# Altium PCB PCB2.PcbDoc (part 1 of 2)
Units mil, origin at the board's own origin, x right, y up, seen from the top; angles counter-clockwise.
Board outline 2024.32 x 2031.2 mil, 4 copper layers (Top Layer, Internal Plane 1, Signal Layer 1, Bottom Layer), stack 46.586 mil thick; 94 components, 65 nets, 310 pads, 967 vias.
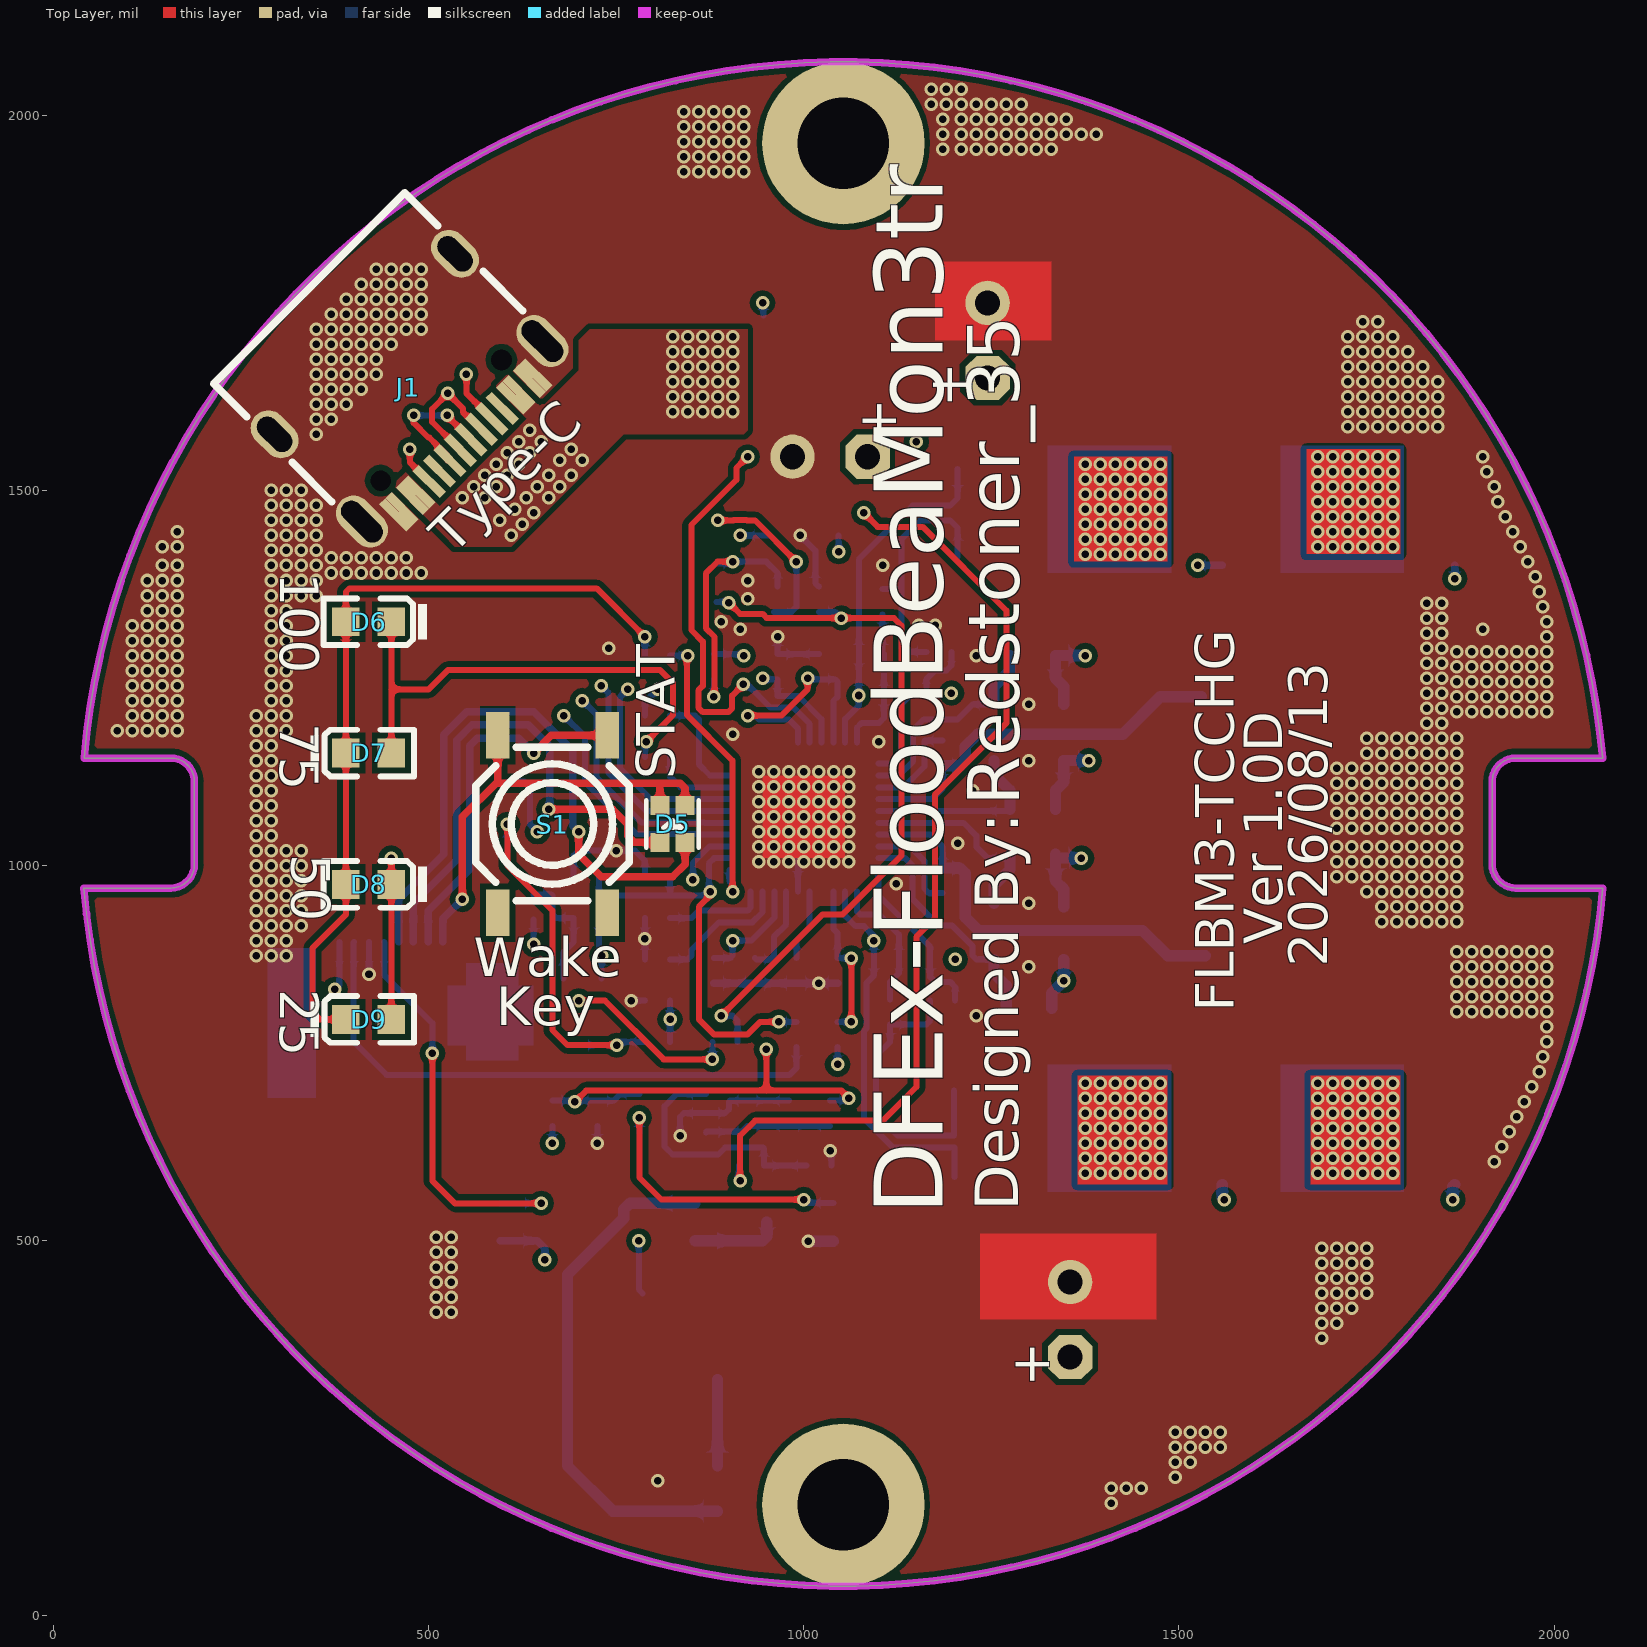
[diagram p0: Top Layer view]
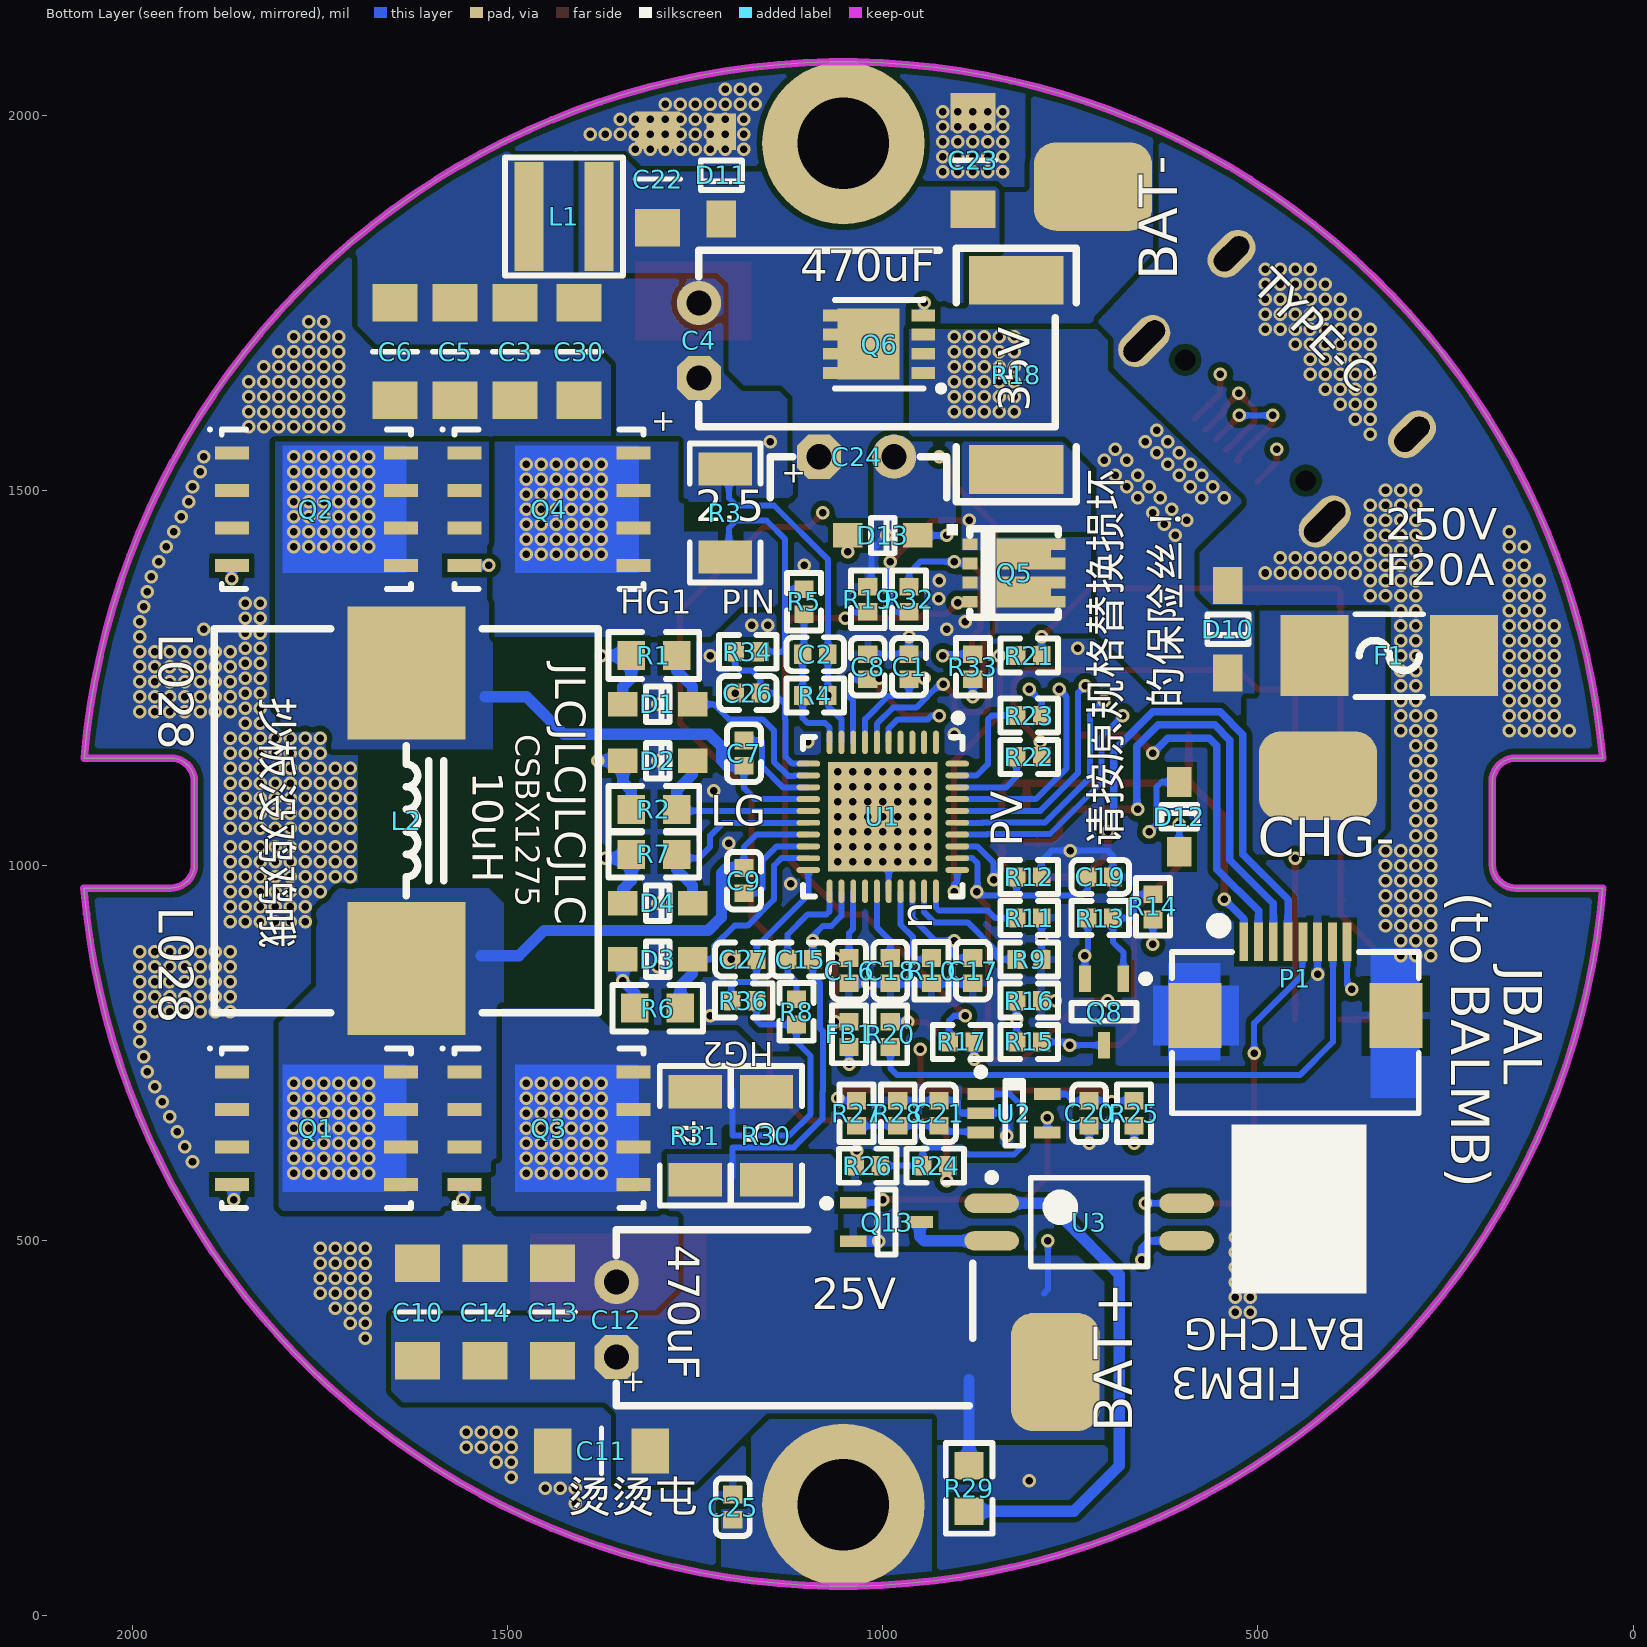
[diagram p1: Bottom Layer view, seen from below]
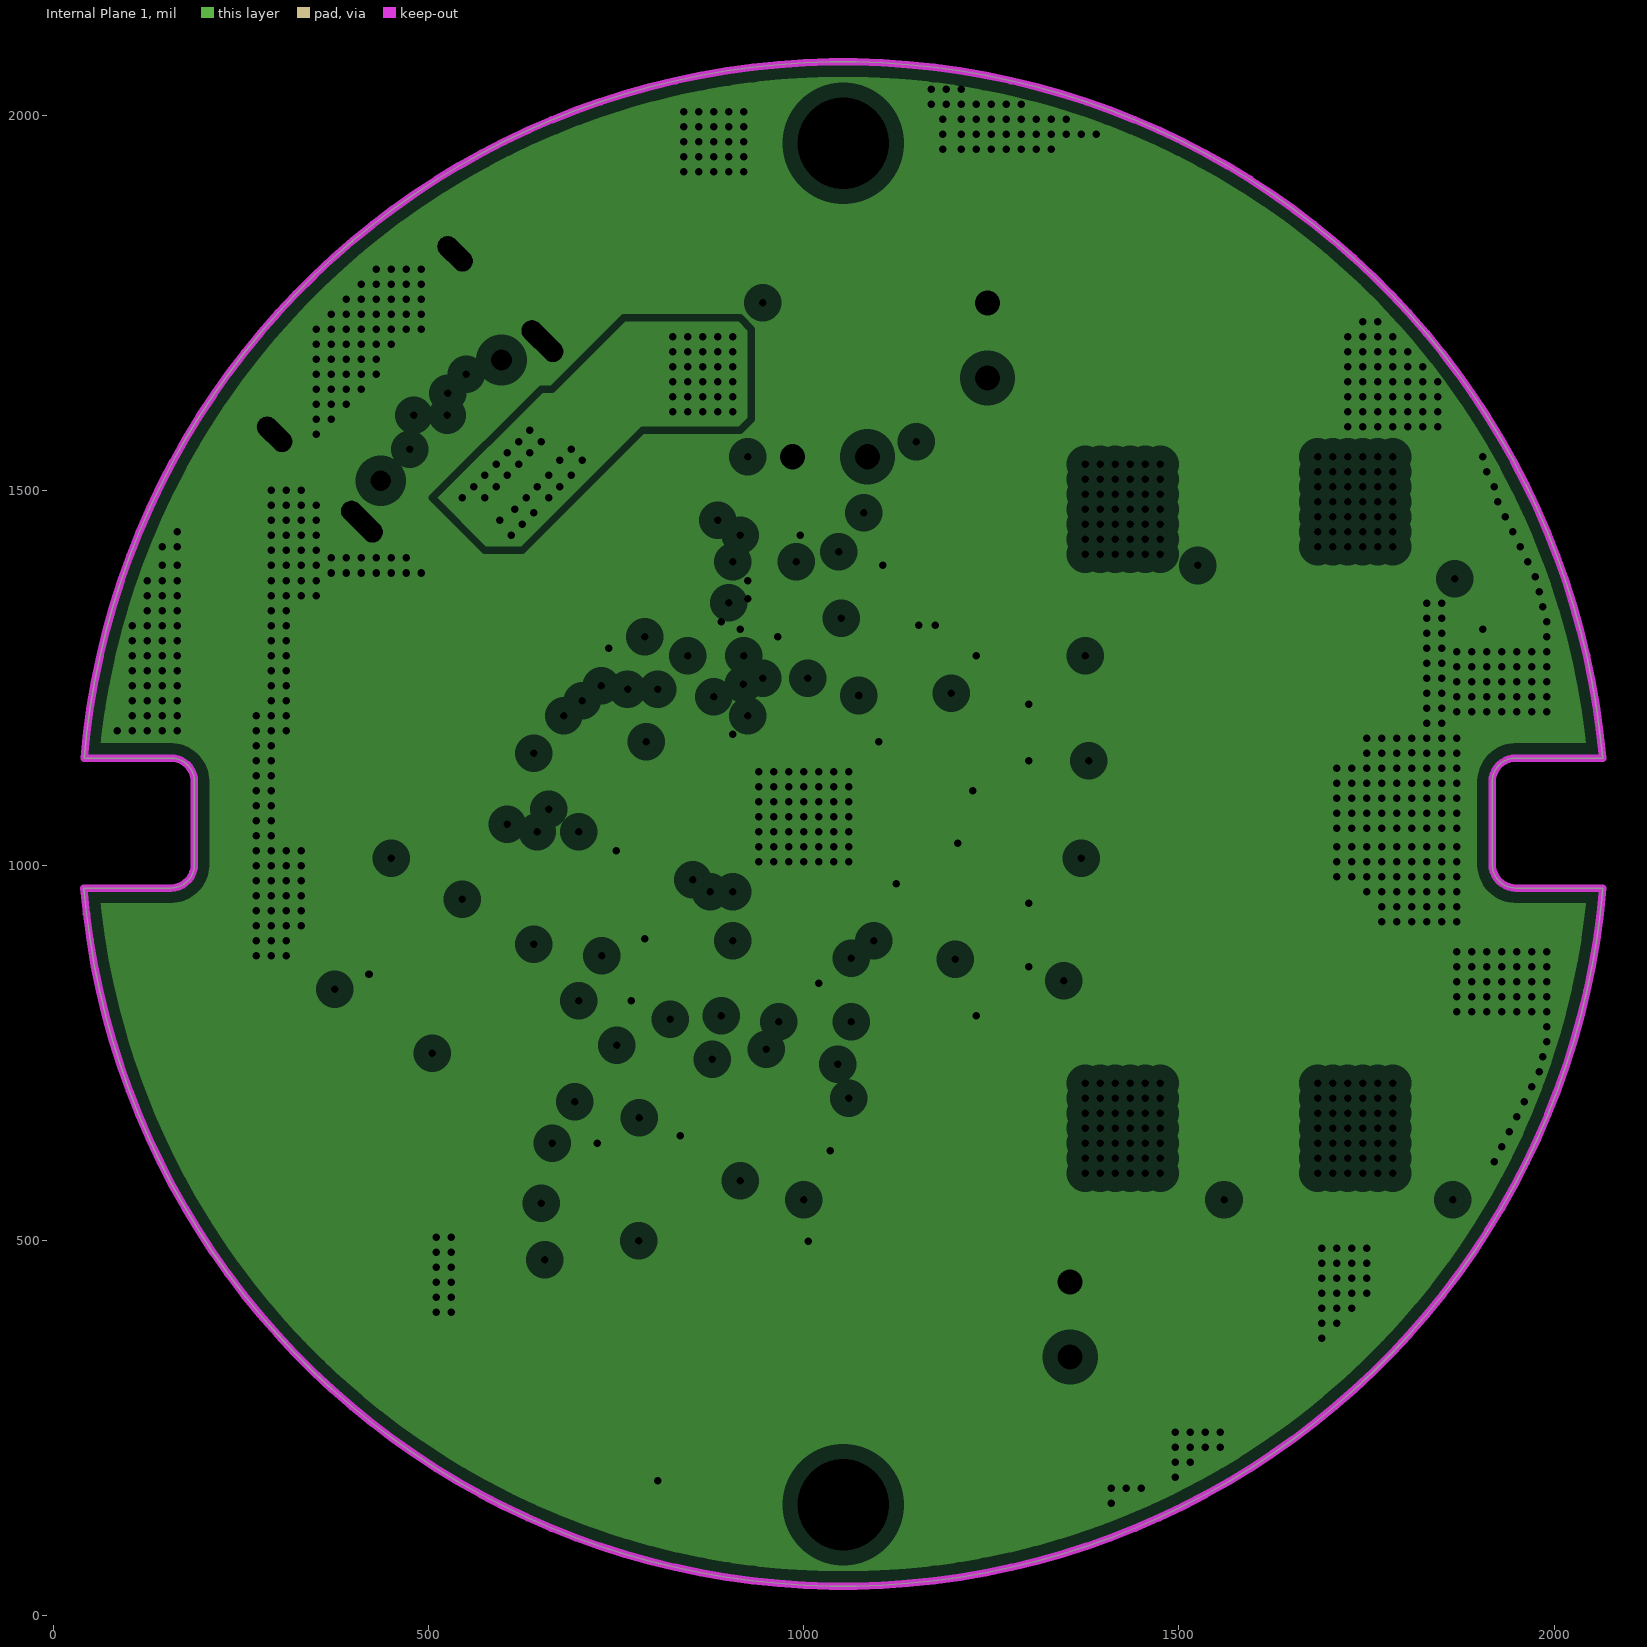
[diagram p2: Internal Plane 1, clearances drawn from the general rule]
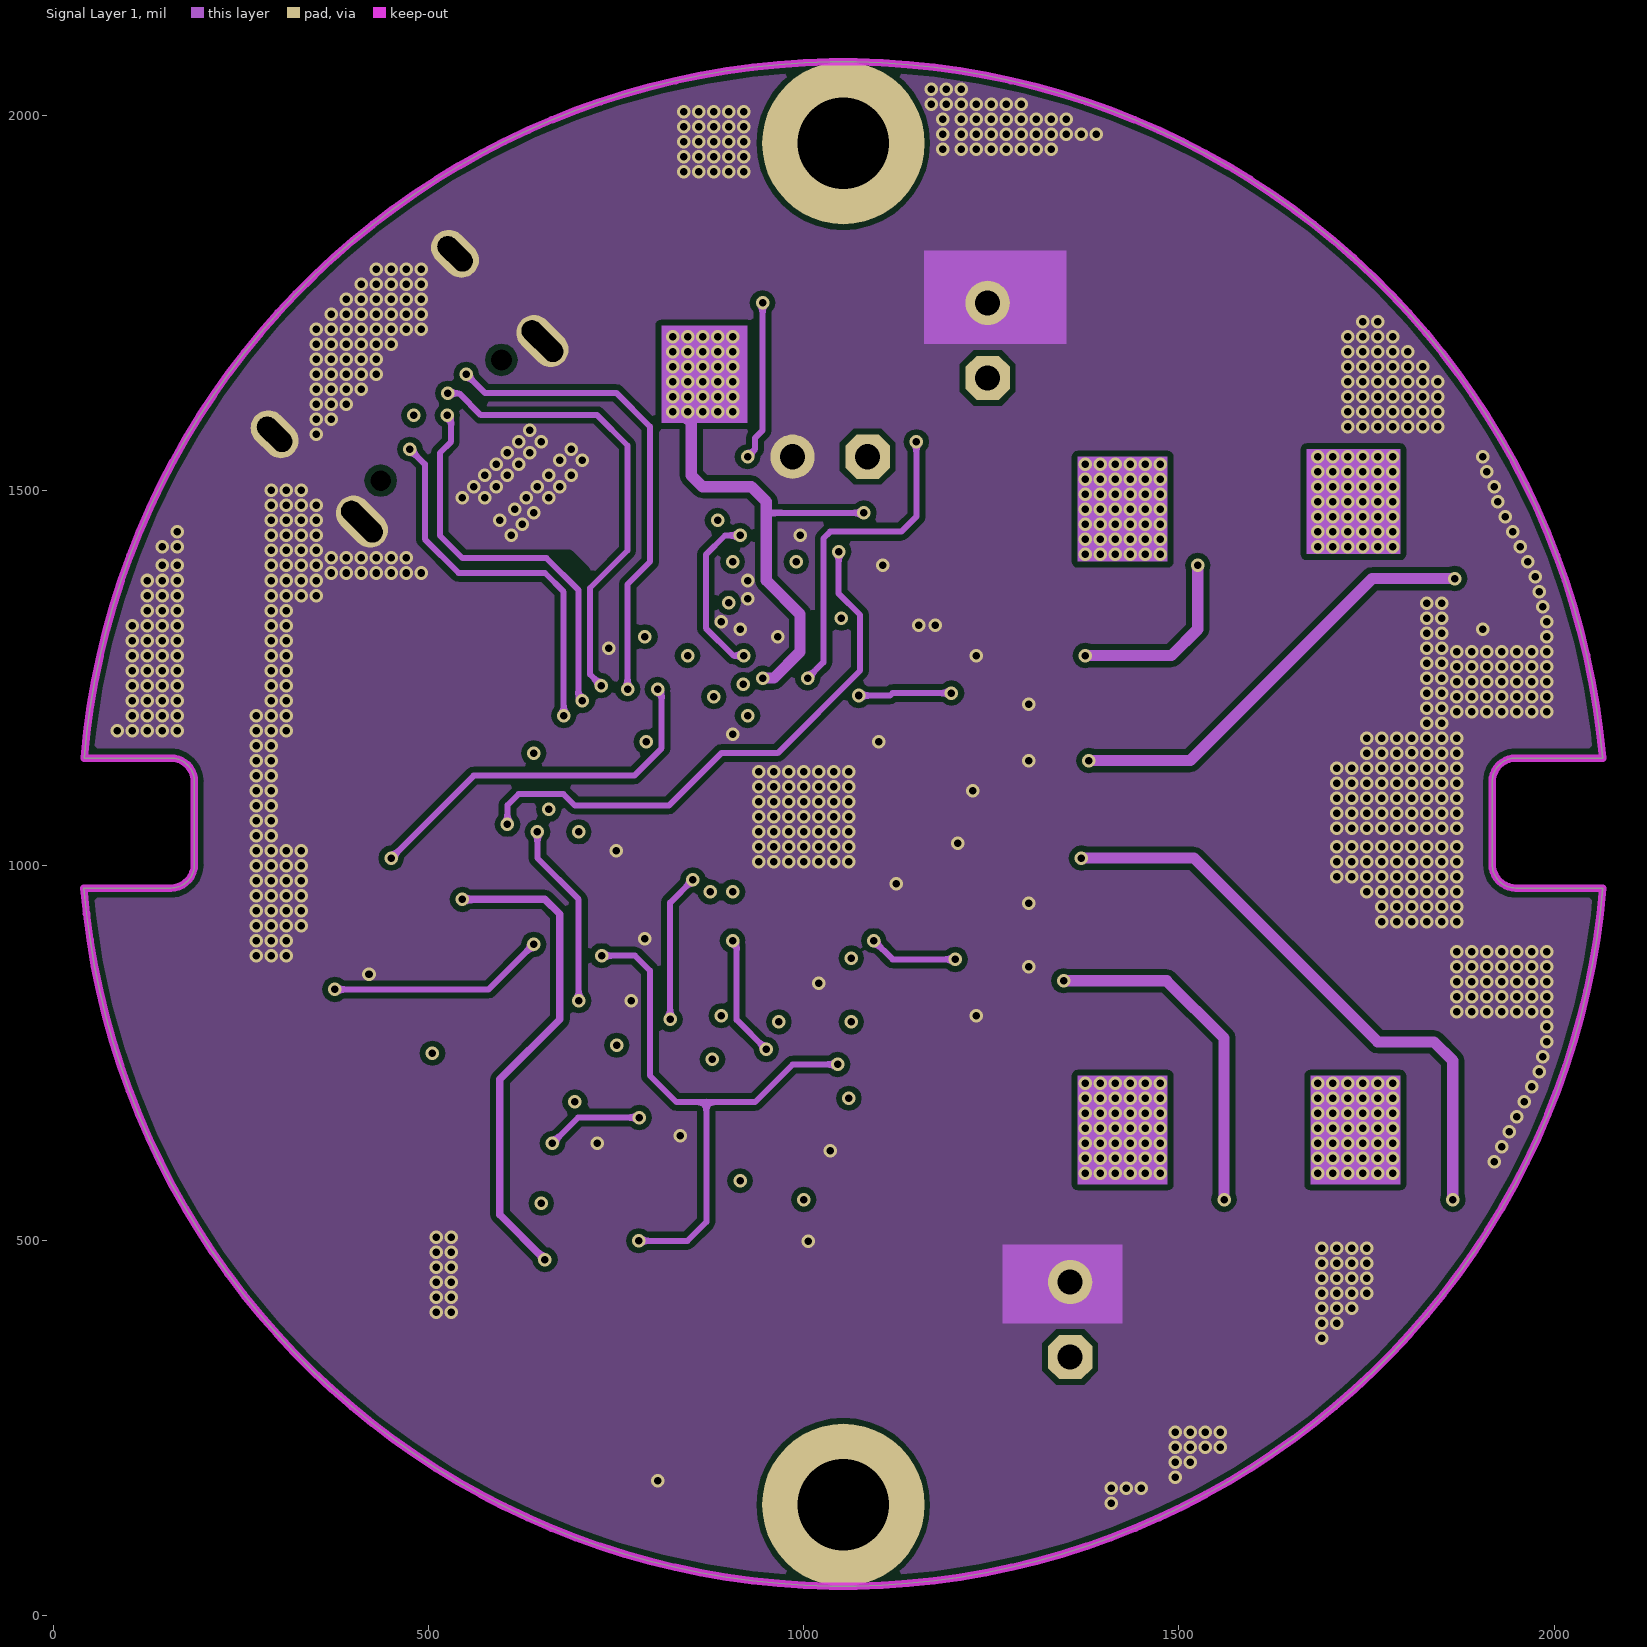
[diagram p3: Signal Layer 1]
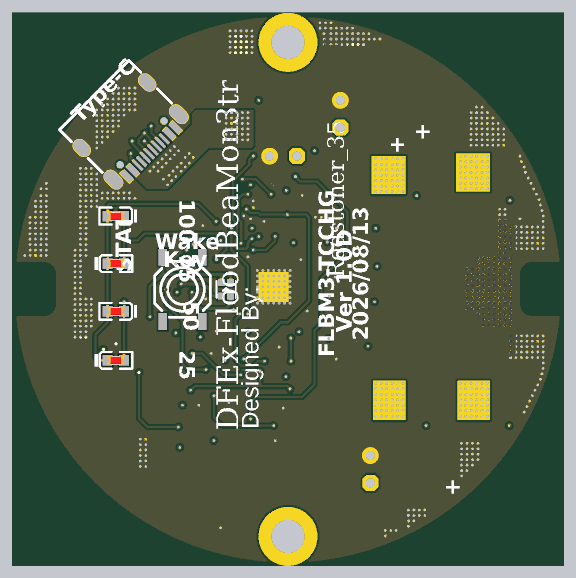
[diagram p5: 3D render of the assembled board from above, using the file's embedded part models]
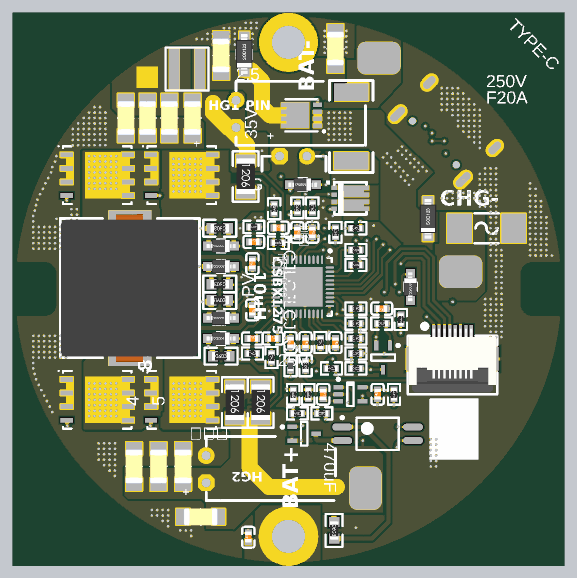
[diagram p6: 3D render of the assembled board from below, using the file's embedded part models]

## Layer stack, top to bottom
Top Solder: solder mask 0.4, Solder Resist, Dk 3.5
Top Layer: signal copper 1.4
Dielectric 1: core 17.976, FR-4, Dk 4.2
Internal Plane 1: plane copper 1.4169
Dielectric 3: prepreg 5, Dk 4.2
Signal Layer 1: signal copper 1.4169
Dielectric 2: core 17.976, Dk 4.2
Bottom Layer: signal copper 1.4
Bottom Solder: solder mask 0.4, Solder Resist, Dk 3.5

## Board outline
40.46,970.17 156.3,970.17 ccw(c156.3,1001.67) 187.8,1001.67 187.8,1111.9 ccw(c156.3,1111.9) 156.3,1143.4 40.68,1143.4 40.68,1143.39 cw(c1052.62,1055.47) 2064.55,1143.39 2064.55,1143.4 1948.94,1143.4 ccw(c1948.94,1111.9) 1917.44,1111.9 1917.44,1001.67 ccw(c1948.94,1001.67) 1948.94,970.17 2064.78,970.17 cw(c1052.62,1055.47)

## Design rules (kind name [scope] priority, off if disabled: settings)
Clearance [All] p1: gap=7.5
PlaneClearance [All] p1: clearance=20
PlaneConnect [All] p1: planeconnectstyle=Direct reliefexpansion=20 reliefentries=4 reliefconductorwidth=10 reliefairgap=10
PolygonConnect PolygonConnect_1 [IsVia] p1: connectstyle=Direct reliefconductorwidth=10 reliefentries=4 polygonreliefangle="90 Angle" airgapwidth=10
PolygonConnect [All] p2: connectstyle=Relief reliefconductorwidth=10 reliefentries=4 polygonreliefangle="90 Angle" airgapwidth=10
RoomDefinition main [InComponentClass('main')] p1: confinementstyle=ConfineIn formatcopy=TRUE lockcomponents=FALSE outline 4345,-715 6420,-715 6420,-125 4345,-125
RoutingVias [All] p1: holewidth=28 width=50 viastyle="Through Hole" minholewidth=28 minwidth=50 maxholewidth=28 maxwidth=50
SolderMaskExpansion [All] p1: expansion=4
Width [All] p1: maxlimit=2000 minlimit=7 preferedwidth=10
28 further rules are at their usual default settings.

## Components (designator, comment, footprint, x,y, rotation, side; value= is the part's Value field where it differs from the comment)
C1 "100nF (104) 10% 50V" 0402_C 965,1265 r270 bottom
C2 "680nF (684) 20% 16V" 0402_C 1090,1281.73 r180 bottom
C3 "C3216X5R1V226M160AC" 1206C 1490,1685 r90 bottom
C4 "F25Z35V470M6x18" ElecCap_Hori 1245,1700 r180 bottom locked
C5 "C3216X5R1V226M160AC" 1206C 1570,1685 r90 bottom
C6 "C3216X5R1V226M160AC" 1206C 1650,1685 r90 bottom
C7 "220nF (224) 10% 16V" 0402_C 1185,1150 r90 bottom
C8 "470NF (474) 10% 50V" 0402_C 1020,1265 r270 bottom
C9 "220nF (224) 10% 16V" 0402_C 1185,980 r270 bottom
C10 "C3216X5R1V226M160AC" 1206C 1620,405 r270 bottom
C11 "C3216X5R1V226M160AC" 1206C 1375,220 r180 bottom
C12 "PA25V470M6x12" ElecCap_Hori 1355,395 r180 bottom
C13 "C3216X5R1V226M160AC" 1206C 1440,405 r270 bottom
C14 "C3216X5R1V226M160AC" 1206C 1530,405 r270 bottom
C15 "2.2uF (225) 10% 10V" 0402_C 1110,875 r180 bottom
C16 "100nF (104) 10% 50V" 0402_C 1045,860 r90 bottom
C17 "10uF (106) 20% 10V" 0402_C 880,860 r270 bottom
C18 "10uF (106) 20% 10V" 0402_C 990,860 r270 bottom
C19 "100nF (104) 10% 16V" 0402_C 710,985 r0 bottom
C20 "100nF (104) 10% 16V" 0402_C 725,670 r90 bottom
C21 "22nF (223) 10% 50V" 0402_C 925,670 r270 bottom
C22 "C3216X5R1V226M160AC" 1206C 1300,1915 r270 bottom
C23 "C3216X5R1V226M160AC" 1206C 880,1940 r270 bottom
C24 "F25Z35V470M6x18" ElecCap_Hori 1035,1545 r270 bottom locked
C25 "10pF (100) 5% 50V" 0402_C 1200,145 r90 bottom
C26 "10pF ±5% 50V" 0402_C 1180,1230 r180 bottom
C27 "10pF ±5% 50V" 0402_C 1185,875 r180 bottom
C30 "C3216X5R1V226M160AC" 1206C 1405,1685 r90 bottom
D1 "B5819WS S4" SOD-323 1300,1215 r0 bottom
D2 "B5819WS S4" SOD-323 1300,1140 r0 bottom
D3 "B5819WS S4" SOD-323 1300,875 r0 bottom
D4 "B5819WS S4" SOD-323 1300,950 r0 bottom
D5 "NCD1615RG1" LED-SMD_4P-L1.6-W1.5-TL-1 825,1055.47 r270 top
D6 "蓝灯 0603" 0603_LED_S1 420,1325 r180 top
D7 "蓝灯 0603" 0603_LED_S1 420,1150 r0 top
D8 "蓝灯 0603" 0603_LED_S1 420,975 r180 top
D9 "蓝灯 0603" 0603_LED_S1 420,795 r0 top
D10 "SMF28A" SOD-123 540,1315 r90 bottom
D11 "SMF28A" SOD-123 1215,1920 r90 bottom
D12 "B5819WS S4" SOD-323 605,1065 r270 bottom
D13 "B5819WS S4" SOD-323 1000,1440 r0 bottom
F1 "BSMD2410C-2200T" Fuse6126 325,1280 r0 bottom
FB1 "EBMS100505A050" 0402_L 1045,775 r270 bottom
J1 "TYPE-C-31-M-12" USB-C-SMD_KH-TYPE-C-16P 482.15,1627.89 r225 top locked
L1 "FEXL0430A-1R0M" XAL4020-xxxME 1425,1865 r180 bottom
L2 "CSBX1275-100M" CSBX1275 1635,1060 r270 bottom
P1 "0.5-8P CTSJ-H2.0 119" "FPC0.5 2H-WS-8P" 450,800 r180 bottom
Q1 "IAUCN04S7L028ATMA1" SON/DFN5x6(MOS) 1755,650 r180 bottom locked
Q2 "IAUCN04S7L028ATMA1" SON/DFN5x6(MOS) 1755,1475 r180 bottom locked
Q3 "IAUCN04S7L028ATMA1" SON/DFN5x6(MOS) 1445,650 r180 bottom locked
Q4 "IAUCN04S7L028ATMA1" SON/DFN5x6(MOS) 1445,1475 r180 bottom locked
Q5 "XPX4896RX" EDFN3x3 825,1390 r270 bottom
Q6 "IAUZN04S7L012ATMA1" DFN-8_L3.0-W3.0-P0.65-BL 1005,1695 r90 bottom
Q8 "BSS84AKW" SC70-3 705,805 r270 bottom
Q13 "2N7002KW" SC70-3 995,525 r180 bottom
R1 "0.5Ω (R050) ±1%" 0603_R 1305,1280 r0 bottom
R2 "0.5Ω (R050) ±1%" 0603_R 1305,1075 r0 bottom
R3 "2.5mΩ (R0025) ±1%" 1206_R 1210,1470 r270 bottom
R4 "DNP" 0402_R 1090,1226.73 r180 bottom
R5 "51Ω (51R0) ±1%" 0402_R 1105,1351.73 r90 bottom
R6 "0.5Ω (R050) ±1%" 0603_R 1300,810 r180 bottom
R7 "0.5Ω (R050) ±1%" 0603_R 1305,1015 r180 bottom
R8 "10Ω (10R0) ±1%" 0402_R 1115,805 r90 bottom
R9 "27KΩ (2702) ±1%" 0402_R 805,875 r0 bottom
R10 "9.1KΩ (9101) ±1%" 0402_R 935,860 r90 bottom
R11 "9.1KΩ (9101) ±1%" 0402_R 805,930 r0 bottom
R12 "10KΩ (1002) ±1%" 0402_R 805,985 r0 bottom
R13 "20KΩ (2002) ±1%" 0402_R 710,930 r0 bottom
R14 "20KΩ (2002) ±1%" 0402_R 640,945 r90 bottom
R15 "47KΩ (4702) ±1%" 0402_R 805,765 r180 bottom
R16 "10KΩ (1002) ±1%" 0402_R 805,820 r0 bottom
R17 "10KΩ (1002) ±1%" 0402_R 895,765 r180 bottom
R18 "FRP2512F68R0TS" 2512 760,1780 r270 bottom
R19 "20KΩ (2002) ±1%" 0402_R 1020,1355 r270 bottom
R20 "1KΩ (1001) ±1%" 0402_R 990,775 r270 bottom
R21 "750Ω (7500) ±1%" 0402_R 805,1280 r180 bottom
R22 "750Ω (7500) ±1%" 0402_R 805,1145 r180 bottom
R23 "750Ω (7500) ±1%" 0402_R 805,1200 r180 bottom
R24 "160KΩ (1603) ±1%" 0402_R 930,600 r0 bottom
R25 "10KΩ (1002) ±1%" 0402_R 665,670 r90 bottom
R26 "22KΩ (2202) ±1%" 0402_R 1020,600 r180 bottom
R27 "47KΩ (4702) ±1%" 0402_R 1035,670 r270 bottom
R28 "8.45KΩ (8451) ±1%" 0402_R 980,670 r270 bottom
R29 "5.1KΩ (5101) ±1%" 0603_R 885,170 r270 bottom
R30 "5mΩ (R005) ±1%" 1206_R 1155,640 r270 bottom
R31 "4mΩ (R004) ±1%" 1206_R 1250,640 r270 bottom
R32 "20KΩ (2002) ±1%" 0402_R 965,1355 r90 bottom
R33 "10KΩ (1002) ±1%" 0402_R 880,1265 r90 bottom
R34 "1Ω (1R50) ±1%" 0402_R 1180,1285 r180 bottom
R36 "1.5Ω (1R50) ±1%" 0402_R 1185,820 r180 bottom
S1 "4x4轻触 3.0mm高度" SW-SMD_4P-L5.2-W5.2-P3.70-LS6.4 665,1055.47 r270 top locked
U1 "IP2366_BZ" QFN40-IP2366 1000,1065 r270 bottom
U2 "LMV331IDCKR" SC70-5 825,670 r180 bottom
U3 "TLP291(GB-TP,SE" SOP127P700X210-4M 725,525 r180 bottom

## Footprints (in the part's own frame and the unit in brackets; to place one, negate y for a bottom-side part, rotate by r counter-clockwise, add the part's x,y. Pads: shape width x height; smd on the part's side, far side on the other; paste and mask are expansions set on the pad)
0402_C [mm]
  rect 0.6x0.65 smd mask+0.051: 1(-0.425,0) 2(0.425,0)
  silkscreen extent -0.97,-0.58 0.97,0.58, body extent -0.48,-0.3 0.52,0.3, height 0.2
0402_L [mm]
  rect 0.6x0.65 smd mask+0.051: 1(-0.425,0) 2(0.425,0)
  silkscreen extent -0.97,-0.58 0.97,0.58, body extent -0.51,-0.26 0.54,0.26, height 0.36
0402_R [mm]
  rect 0.6x0.65 smd mask+0.051: 1(-0.425,0) 2(0.425,0)
  silkscreen extent -0.97,-0.58 0.97,0.58, body extent -0.57,-0.27 0.57,0.28, height 0.41
0603_LED_S1 [mm]
  rect 0.93x0.98 smd: A(0.77,0) K(-0.77,0)
  silkscreen extent -1.98,-0.79 1.54,0.79, body extent -0.8,-0.4 0.8,0.4, height 0.6
0603_R [mm]
  rect 0.93x0.98 smd: 1(-0.77,0) 2(0.77,0)
  silkscreen extent -1.53,-0.79 1.54,0.79, body extent -0.85,-0.4 0.85,0.4, height 0.56
1206_R [mm]
  rect 1.13x1.8 smd: 1(-1.49,0) 2(1.49,0)
  silkscreen extent -2.36,-1.2 2.35,1.2, body extent -1.7,-0.86 1.65,0.87, height 0.85
1206C [mil]
  rect 50x60 smd: 1(-65,0) 2(65,0)
  silkscreen extent 0,-30 0,30, body extent -63,-31 63,31, height 37
2512 [mm]
  rect 1.65x3.2 smd: 1(0,-1.575) 2(6.401,-1.575)
  silkscreen extent -1.09,-3.61 7.49,0.46
CSBX1275 [mm] "科达嘉CSBX系列合金磁芯扁线大电流电感，12.8*12.8*7.5mm"
  rect 4.5x4 smd mask+0.03: 1(-5,0) 2(5,0)
  silkscreen extent -6.5,-6.5 6.5,6.5, body extent -6.9,-6.45 6.9,6.35, height 7.1
DFN-8_L3.0-W3.0-P0.65-BL [mm]
  rect 0.4x0.8 smd paste-100 mask+0.051: 1(-0.975,-1.5) 2(-0.325,-1.5) 3(0.325,-1.5) 4(0.975,-1.5) 5(0.975,1.5) 6(0.325,1.5) 7(-0.325,1.5) 8(-0.975,1.5)
  rect 2.4x2.1 smd paste-100 mask+0.051: 8(0,0.35)
  silkscreen extent -1.6,-2.2 1.5,1.5, body extent -1.52,-1.52 1.52,1.52, height 1.2
EDFN3x3 [mm] "Package for EMF20B02V, Dual Drain DFN3x3"
  rect 0.4x0.5 smd mask+0.03: 1(-0.975,-1.494) 2(-0.325,-1.494) 3(0.325,-1.494) 4(0.975,-1.494) 5(0.325,1.494) 5(0.975,1.494) 6(-0.975,1.494) 6(-0.325,1.494)
  rect 1.05x1.85 smd mask+0.03: 5(0.65,0.321) 6(-0.65,0.321)
  silkscreen extent -1.65,-2.29 1.5,1.5, body extent -1.52,-1.52 1.52,1.52, height 0.9
ElecCap_Hori [mm] "水平安装的电容 6x12mm"
  oct 1.5x1.5 hole 0.85 mask+0.03: 1(0,-1.27)
  round 1.5 hole 0.85 mask+0.03: 2(0,1.27)
  silkscreen extent 0,-2.92 1.4,3.05
"FPC0.5 2H-WS-8P" [mm] "长：8.2mm，宽：5.2mm，高：2mm"
  rect 1.8x2.2 smd: 0(-3.4,0) 0(3.4,0)
  rect 0.3x1.3 smd: 1(-1.75,2.497) 2(-1.25,2.497) 3(-0.75,2.497) 4(-0.25,2.497) 5(0.25,2.497) 6(0.75,2.497) 7(1.25,2.497) 8(1.75,2.497)
  silkscreen extent -4.17,-3.3 4.17,3.23, body extent -4.1,-3.15 4.1,2.85, height 2
Fuse6126 [mm] "LittleFuse, 2-Leads, Body 6.20x2.60mm, IPC Medium Density"
  rect 2.3x2.75 smd: 1(-2.525,0) 2(2.525,0)
  silkscreen extent -1.14,-1.4 1.14,1.4, body extent -3.15,-1.4 3.15,1.4, height 2.8
LED-SMD_4P-L1.6-W1.5-TL-1 [mm]
  rect 0.65x0.65 smd mask+0.051: 1(-0.625,0.425) 2(-0.625,-0.425) 3(0.625,-0.425) 4(0.625,0.425)
  silkscreen extent -0.8,-0.89 0.8,0.89
QFN40-IP2366 [mm] "QFN, 40-Leads, Body 5.00x5.00mm, Pitch 0.40mm, Thermal Pad 3.70x3.70mm, IPC Medium Density"
  oval 0.8x0.2 smd mask+0.02: 1(-2.52,1.8) 2(-2.52,1.4) 3(-2.52,1) 4(-2.52,0.6) 5(-2.52,0.2) 6(-2.52,-0.2) 7(-2.52,-0.6) 8(-2.52,-1) 9(-2.52,-1.4) 10(-2.52,-1.8) 21(2.52,-1.8) 22(2.52,-1.4) 23(2.52,-1) 24(2.52,-0.6) 25(2.52,-0.2) 26(2.52,0.2) 27(2.52,0.6) 28(2.52,1) 29(2.52,1.4) 30(2.52,1.8)
  oval 0.2x0.8 smd mask+0.02: 11(-1.8,-2.52) 12(-1.4,-2.52) 13(-1,-2.52) 14(-0.6,-2.52) 15(-0.2,-2.52) 16(0.2,-2.52) 17(0.6,-2.52) 18(1,-2.52) 19(1.4,-2.52) 20(1.8,-2.52) 31(1.8,2.52) 32(1.4,2.52) 33(1,2.52) 34(0.6,2.52) 35(0.2,2.52) 36(-0.2,2.52) 37(-0.6,2.52) 38(-1,2.52) 39(-1.4,2.52) 40(-1.8,2.52)
  rect 3.7x3.7 smd mask+0.02: 41(0,0)
  silkscreen extent -3.47,-2.7 2.7,2.7, body extent -2.55,-2.55 2.55,2.55, height 0.8
SC70-3 [mm] "3 Lead SC70(SOT-323) package for small Transistor"
  rect 0.9x0.4 smd mask+0.05: 1(-1.125,0.65) 2(-1.125,-0.65) 3(1.125,0)
  silkscreen extent -1.25,-1.1 0.3,1.52, body extent -0.67,-1.1 0.67,1.1, height 1.1
SC70-5 [mm] "SOT23, 6-Leads, Body 2.00x2.10mm, Pitch 0.65mm, IPC Medium Density"
  rect 0.9x0.4 smd mask+0.05: 1(-1.125,0.65) 2(-1.125,0) 3(-1.125,-0.65) 4(1.125,-0.65) 5(1.125,0.65)
  silkscreen extent -1.25,-1.1 0.3,1.52, body extent -0.67,-1.1 0.67,1.1, height 1.1
SOD-123 [mm]
  rect 1.25x1 smd: 1(1.475,0) 2(-1.475,0)
  silkscreen extent -0.5,-0.7 0.5,0.7, body extent -1.85,-0.77 1.85,0.78, height 1.35
SOD-323 [mm]
  rect 1x0.83 smd: 1(1.18,0) 2(-1.18,0)
  silkscreen extent -0.4,-0.6 0.4,0.6, body extent -1.35,-0.62 1.35,0.62, height 1.1
SON/DFN5x6(MOS) [mm] "SON, 8-Leads, Body 5.00x6.00mm, Pitch 1.27mm, Thermal Pad 4.00x3.53mm, IPC Low Density"
  rect 1.15x0.45 smd: 1(-2.86,1.905) 2(-2.86,0.635) 3(-2.86,-0.635) 4(-2.86,-1.905) 5(2.86,-1.905) 6(2.86,-0.635) 7(2.86,0.635) 8(2.86,1.905)
  Top Layer region: -1.143,2.159 3.048,2.159 3.048,-2.159 -1.143,-2.159
  silkscreen extent -3.65,-2.7 3.2,2.75, body extent -3.05,-2.55 3.05,2.55, height 1.05
SOP127P700X210-4M [mm] "SOP, 4-Leads, Body 2.70x4.40mm, Pitch 1.27mm, IPC Low Density"
  oval 1.85x0.65 smd: 1(-3.3,0.635) 2(-3.3,-0.635) 3(3.3,-0.635) 4(3.3,0.635)
  silkscreen extent -3.43,-1.5 1.97,1.63, body extent -2.2,-1.5 2.2,1.5, height 2.1
SW-SMD_4P-L5.2-W5.2-P3.70-LS6.4 [mm]
  rect 1.58x0.8 smd mask+0.051: 1(-3,1.85) 2(3,1.85) 3(-3,-1.85) 4(3,-1.85)
  silkscreen extent -2.6,-2.6 2.6,2.6
USB-C-SMD_KH-TYPE-C-16P [mm]
  rect 0.1x0.1 hole 0.7 mask+0.05: 0(-2.89,1.235) 0(2.89,1.235)
  oval 1.2x2 hole 0.7 slot 1.7 at 90 deg mask+0.051: 1(-4.32,1.765) 1(4.32,1.765)
  oval 1.2x1.8 hole 0.7 slot 1.4 at 90 deg mask+0.051: 1(-4.32,-2.415) 1(4.32,-2.415)
  rect 0.3x1.3 smd paste-100 mask+0.05: A1(-3.35,2.415) A4(-2.55,2.415) A5(-1.25,2.415) A6(-0.25,2.415) A7(0.25,2.415) A8(1.25,2.415) A9(2.55,2.415) A12(3.35,2.415) B1(3.05,2.415) B4(2.25,2.415) B5(1.75,2.415) B6(0.75,2.415) B7(-0.75,2.415) B8(-1.75,2.415) B9(-2.25,2.415) B12(-3.05,2.415)
  silkscreen extent -4.57,-5.08 4.57,0.57
XAL4020-xxxME [mm] "CoilCraft Molded inductor 4x4mm,2mm height"
  rect 0.98x3.7 smd mask+0.05: 1(-1.185,0) 2(1.185,0)
  silkscreen extent -2,-2 2,2, body extent -2.03,-2.03 2.03,2.03, height 2

## Part data
C1 C16 C19 C20: library part "0402 100nF (104) 10% 16V", "贴片电容"
C2: library part "0402 470nF (474) 10% 10V", "贴片电容"
C3 C5 C6 C10 C11 C13 C14 C22 C23 C30: library part Cap, "1206尺寸TDK MLCC 35V 22uF"
C4 C24: library part CAP2, "直插艾华固态电容，耐压35V容量470uF，尺寸D6.3x18"
C7 C9: library part "0402 220nF (224) 10% 16V", "贴片电容"
C8 C15: library part "0402 1.0uF (105) 10% 25V", "贴片电容"
C12: library part CAP2, "直插固态电容，耐压25V容量470uF，尺寸D6.3x12"
C17 C18: library part "0402 10uF (106) 20% 6.3V", "贴片电容"
C21: library part "0402 22nF (223) 10% 50V", "贴片电容"
C25: library part "0402 10pF (100) 5% 50V", "贴片电容"
C26 C27: library part "0402 1nF (102) 10% 50V", "贴片电容"
D1 D2 D3 D4 D12 D13: library part "SOD-323 1N4148WS T4", "二极管"
D5: library part "0606DualColor LED", "国星光电 0606(1615) 尺寸 双色LED 红色/翠绿"
D6 D7 D8 D9: library part "0603 蓝灯", "发光二极管"
D10 D11: library part "SOD-123 B5819W  SL", "SOD123封装单向TVS二极管 28V反向截止电压 峰值脉冲电流4.4A@10/1000us"
F1: library part "Fuse 1", "2410尺寸 20A 250V 一次性 慢速熔断陶瓷保险丝"
FB1: library part "0402 12nH  5%", "贴片磁珠 200mA 5R±25% 100MHz"
J1: library part KH-TYPEC-16P, "16Pin TypeC卧式贴片座子，韩国韩荣"
L1: library part "Inductor Iron", "长江微电一体成型电感，1.0uH±20% 14.6mΩ DCR 9.8A饱和电流"
L2: library part "Inductor Iron", "科达嘉电子扁线一体成型电感，13.8*12.8*7.3mm，10uH 21.0A 8.77mΩ"
P1: library part "CON 8", "FFC/FPC连接器 间距：0.5mm，P数：8P，卧贴，抽屉式上接，厚度H2.0mm"
Q1 Q2 Q3 Q4: library part "SON/DFN5x6 MOS", "40V, N-Ch, 2.80m? max, Automotive MOSFET, SSO8(5x6), OptiMOS? 7"
Q5: library part XPX10H03RX, "双N沟道MOSFET, DFN3x3 40V 45A 7.2mΩ"
Q6: library part "SON/DFN5x6 MOS", "OptiMOS 7 40V Logic Level Power MOSFET, 1.55mΩ @ 4.5V LL,S3O8(PDFN3333) Package"
Q8: library part SI2301CDS-T1-GE3, "单P沟道小信号MOSFET(场效应管)"
Q13: library part "2N7002 7002", "单N沟道MOSFET(场效应管)"
R1 R2 R6 R7: library part "0603 0Ω (0R0) 1%", "贴片电阻"
R3: library part "1206 0Ω (0R0) 1%", "1206贴片合金检流电阻 2.5mΩ"
R4: library part "0402 3.3KΩ (3301) 1%", "贴片电阻(暂时空置)"
R5 R34 R36: library part "0402 51Ω (51R0) 1%", "贴片电阻"
R8: library part "0402 10Ω (10R0) 1%", "贴片电阻"
R9: library part "0402 18KΩ (1802) 1%", "贴片电阻"
R10 R11 R12 R16 R17 R25 R28 R33: library part "0402 10KΩ (1002) 1%", "贴片电阻"
R13 R14 R19 R32: library part "0402 20KΩ (2002) 1%", "贴片电阻"
R15 R27: library part "0402 47KΩ (4702) 1%", "贴片电阻"
R18: library part Res, "高功率2512封装厚膜电阻 68Ω ±1% 2W"
R20: library part "0402 1KΩ (1001) 1%", "贴片电阻"
R21 R22 R23: library part "0402 200Ω (2000) 1%", "贴片电阻"
R24: library part "0402 100KΩ (1003) 1%", "贴片电阻"
R26: library part "0402 22KΩ (2202) 1%", "贴片电阻"
R29: library part "0603 4.7KΩ (4701) 1%", "贴片电阻"
R30 R31: library part "1206 0Ω (0R0) 1%", "贴片合金检流电阻"
S1: library part SW-PB, "4x4mm锅仔片结构金属轻触开关 H3.0mm"
U1: "支持多种快充协议，最高140W功率的充放电管理SoC"
U2: "单路通用低电压比较器，2.7-5.5V，SC70-5封装"
U3: library part Optoisolator1, "DC输入 光电耦合隔离器 隔离电压(rms):3750V SOP-4封装"

## Free pads (board coordinates)
  round 216.54 hole 122.05 mask+1.18: 0(1052.6,1962.95) 1(1052.6,147.99)
  rrect50% 157.48x118.11 smd far side mask+1.18: 3(420,1120) 3(720,1905)
  rrect50% 118.11x157.48 smd far side mask+1.18: 3(770,325)

## Via types
v1: diameter 18, hole 10, Top Layer to Bottom Layer, tented both sides, 967 vias

## Nets (pads, with @x,y where several pads share a name; then routed paths per layer and width w, separated by ;. In a path a pad name is that pad's centre, name@x,y a point inside that pad or via, vN(x,y) a via of type N, cw(c..) or ccw(c..) an arc to the next point about the centre after c; other vN are vias at no path point)
ACTN: P1.8 R14.1 | length 389
  Signal Layer 1 w8: v1(375,835) 579.97,834.97 v1(640,895)
  Bottom Layer w8: v1(375,835) 381.1,841.1 P1.8@381.1,898.31 ; v1(640,895) 640,905 R14.1@640,928.27
BAT-: pad.3@720,1905 R18.1
BATT_PEAK: C27.2 R36.1 U1.20 | length 228.3
  Bottom Layer w8: U1.20@1099.21,994.13 1099.21,960.79 1168.27,891.73 C27.2@1168.27,875 1168.27,851.73 1175,845 1195,845 1201.73,838.27 R36.1@1201.73,820
BST1: C7.2 U1.13 | length 131.6
  Bottom Layer w8: U1.13@1099.21,1104.37 1106.79,1104.37 1107.1,1104.06 1117.42,1104.06 1117.48,1104 1132.55,1104 1160.7,1132.16 1160.7,1165.7 1161.73,1166.73 C7.2@1185,1166.73
BST2: C9.2 U1.18 | length 133.2
  Bottom Layer w8: U1.18@1099.21,1025.63 1141.29,1025.63 1160.5,1006.42 1160.5,969.5 1166.73,963.27 C9.2@1185,963.27
CASE: C25.1 pad.1
CC1: J1.A5 U1.37 | length 982.2
  Top Layer w8: v1(550,1655) 550.5,1654.5 550.5,1629.13 J1.A5@584.18,1595.45
  Signal Layer 1 w8: v1(550,1655) 575,1630 750,1630 795,1585 795,1405 765,1375 v1(765,1235)
  Bottom Layer w8: v1(765,1235) 755,1225 755,1130 796.38,1088.62 U1.37@900.79,1088.62
CC2: J1.B5 U1.34 | length 883.1
  Top Layer w8: v1(475,1555) 475,1537.6 J1.B5@500.66,1511.94
  Signal Layer 1 w8: v1(475,1555) 495,1535 495,1435 540,1390 655,1390 680,1365 v1(680,1200)
  Bottom Layer w8: v1(680,1200) 708.5,1171.5 708.5,1110.74 777.12,1042.12 860.48,1042.12 861.22,1041.38 U1.34@900.79,1041.38
CH-: F1.2 pad.3@420,1120
CHGDISN: P1.7 R20.2 | length 773.7
  Bottom Layer w8: P1.7@400.79,898.31 399.97,897.49 399.97,765.03 443.77,721.23 981.23,721.23 990,730 R20.2@990,758.27
EN: R15.1 R16.2 U1.33 | length 333.9
  Signal Layer 1 w8: v1(821.73,795) 821.73,950.72 v1(852.27,981.27)
  Bottom Layer w8: R15.1@821.73,765 v1(821.73,795) R16.2@821.73,820 ; v1(852.27,981.27) 852.27,1003.69 874.21,1025.63 U1.33@900.79,1025.63
ENG: Q5.4 R17.1 R19.2 | length 975.7
  Top Layer w8: v1(890,800) 1025,935 1051.85,935 1130.04,1013.19 1130.04,1319.96 1120,1330 v1@1055,1330 ; v1(900,1350.5) 915,1335.5 923.49,1335.5 945,1335.5 950.5,1330 v1(1050,1330)
  Bottom Layer w8: Q5.4@883.81,1351.61 898.89,1351.61 v1(900,1350.5) ; v1(890,800) 905,800 911.73,793.27 R17.1@911.73,765 ; R19.2@1020,1338.27 1041.73,1338.27 v1(1050,1330)
ENG2: Q5.2 R32.2 R33.1 | length 341.5
  Top Layer w8: v1(880,1225) 881,1226 881,1305.01 869.5,1316.51 869.5,1389.5 885,1405 v1(905,1405)
  Bottom Layer w8: v1(880,1225) R33.1@880,1248.27 ; Q5.2@883.81,1402.8 902.8,1402.8 v1(905,1405) 950,1405 965,1390 R32.2@965,1371.73
GLED: D5.3 P1.3 | length 697.1
  Top Layer w10: v1(660,1075) 745,1075 765,1055 765,1040 774.14,1030.86 D5.3@808.27,1030.86
  Bottom Layer w10: P1.3@479.53,898.31 479.53,949.53 537.5,1007.5 537.5,1167.25 557.75,1187.5 632.91,1187.5 661.5,1158.91 661.5,1076.5 v1(660,1075)
GND: C1.1 C3.1 C4.2 C5.1 C6.1 C8.1 C10.1 C11.1 C12.2 C13.1 C14.1 C16.1 C17.2 C18.2 C19.1 C20.1 C21.1 C22.1 C23.1 C24.2 C25.2 C30.1 D10.1 D11.1 F1.1 J1.1 J1.A1 J1.A12 J1.B1 J1.B12 P1.0 P1.6 Q1.1 Q1.2 Q1.3 Q2.1 Q2.2 Q2.3 Q5.3 Q13.2 R9.1 R10.1 R11.1 R12.1 R16.1 R19.1 R26.1 R28.1 U1.26 U1.41 U2.2 | length 957.8
  Bottom Layer w8: v1@420,855 v1(420.47,855.47) P1.6@420.47,898.31 ; C19.1@693.27,985 693.27,1013.27 700,1020 v1(750,1020) 775,1020 788.27,1006.73 R12.1@788.27,985 ; v1(725,630) C20.1@725,653.27 ; v1(770,820) R16.1@788.27,820 ; R9.1@788.27,875 v1(788.27,902.5) R11.1@788.27,930 ; v1(835,640) 835,665 840,670 U2.2@869.29,670 895,670 900,675 900,685 901.73,686.73 C21.1@925,686.73 R28.1@980,686.73 ; v1(965,1305) C1.1@965,1281.73 C8.1@1020,1281.73 ; U1.26@992.13,965.79 992.13,1057.13 v1(1000,1065) ; v1(995,1440) 1015.27,1419.73 1015.27,1376.46 R19.1@1020,1371.73 ; v1(1035,620) 1036.73,618.27 R26.1@1036.73,600
  Bottom Layer w10: C17.2@880,843.27 R10.1@935,843.27 C16.1@1045,843.27
  Bottom Layer w15: v1@1005,500 v1(1005.59,499.41) Q13.2@1039.29,499.41
  other v1: 1410,150 1410,170 1430,170 1450,170 805,180 1495,185 1495,205 1515,205 1495,225 1515,225 1535,225 1555,225 1495,245 1515,245 1535,245 1555,245 1690,370 1690,390 1710,390 510,405 530,405 1690,410 1710,410 1730,410 510,425 530,425 1690,430 1710,430 1730,430 1750,430 510,445 530,445 1690,450 1710,450 1730,450 1750,450 510,465 530,465 1690,470 1710,470 1730,470 1750,470 510,485 530,485 1690,490 1710,490 1730,490 1750,490 510,505 530,505 1920,605 1930,625 1940,645 1950,665 1960,685 1970,705 1980,725 1985,745 1990,765 1990,785 1230,800 1870,805 1890,805 1910,805 1930,805 1950,805 1970,805 1990,805 1870,825 1890,825 1910,825 1930,825 1950,825 1970,825 1990,825 1020,843.27 1870,845 1890,845 1910,845 1930,845 1950,845 1970,845 1990,845 1300,865 1870,865 1890,865 1910,865 1930,865 1950,865 1970,865 1990,865 270,880 290,880 310,880 1870,885 1890,885 1910,885 1930,885 1950,885 1970,885 1990,885 270,900 290,900 310,900 270,920 290,920 310,920 330,920 1770,925 1790,925 1810,925 1830,925 1850,925 1870,925 270,940 290,940 310,940 330,940 1770,945 1790,945 1810,945 1830,945 1850,945 1870,945 1300,950 270,960 290,960 310,960 330,960 1750,965 1770,965 1790,965 1810,965 1830,965 1850,965 1870,965 1122.9,975.85 270,980 290,980 310,980 330,980 1710,985 1730,985 1750,985 1770,985 1790,985 1810,985 1830,985 1850,985 1870,985 270,1000 290,1000 310,1000 330,1000 940,1005 960,1005 980,1005 1000,1005 1020,1005 1040,1005 1060,1005 1710,1005 1730,1005 1750,1005 1770,1005 1790,1005 1810,1005 1830,1005 1850,1005 1870,1005 270,1020 290,1020 310,1020 330,1020 940,1025 960,1025 980,1025 1000,1025 1020,1025 1040,1025 1060,1025 1710,1025 1730,1025 1750,1025 1770,1025 1790,1025 1810,1025 1830,1025 1850,1025 1870,1025 1205,1030 270,1040 290,1040 940,1045 960,1045 980,1045 1000,1045 1020,1045 1040,1045 1060,1045 1710,1050 1730,1050 1750,1050 1770,1050 1790,1050 1810,1050 1830,1050 1850,1050 1870,1050 270,1060 290,1060 940,1065 960,1065 980,1065 1020,1065 1040,1065 1060,1065 1710,1070 1730,1070 1750,1070 1770,1070 1790,1070 1810,1070 1830,1070 1850,1070 1870,1070 270,1080 290,1080 940,1085 960,1085 980,1085 1000,1085 1020,1085 1040,1085 1060,1085 1710,1090 1730,1090 1750,1090 1770,1090 1790,1090 1810,1090 1830,1090 1850,1090 1870,1090 270,1100 290,1100 1225,1100 940,1105 960,1105 980,1105 1000,1105 1020,1105 1040,1105 1060,1105 1710,1110 1730,1110 1750,1110 1770,1110 1790,1110 1810,1110 1830,1110 1850,1110 1870,1110 270,1120 290,1120 940,1125 960,1125 980,1125 1000,1125 1020,1125 1040,1125 1060,1125 1710,1130 1730,1130 1750,1130 1770,1130 1790,1130 1810,1130 1830,1130 1850,1130 1870,1130 270,1140 290,1140 1300,1140 1750,1150 1770,1150 1790,1150 1810,1150.33 1830,1150 1850,1150 1870,1150 270,1160 290,1160 1100,1165 1750,1170 1770,1170 1790,1170 1810,1170 1830,1170 1850,1170 1870,1170 905,1175 85,1180 105,1180 125,1180 145,1180 165,1180 270,1180 290,1180 310,1180 1830,1190 1850,1190 105,1200 125,1200 145,1200 165,1200 270,1200 290,1200 310,1200 1870,1205 1890,1205 1910,1205 1930,1205 1950,1205 1970,1205 1990,1205 1830,1210 1850,1210 1300,1215 105,1220 125,1220 145,1220 165,1220 290,1220 310,1220 1870,1225 1890,1225 1910,1225 1930,1225 1950,1225 1970,1225 1990,1225 1830,1230 1850,1230 105,1240 125,1240 145,1240 165,1240 290,1240 310,1240 1870,1245 1890,1245 1910,1245 1930,1245 1950,1245 1970,1245 1990,1245 1830,1250 1850,1250 105,1260 125,1260 145,1260 165,1260 290,1260 310,1260 1870,1265 1890,1265 1910,1265 1930,1265 1950,1265 1970,1265 1990,1265 1830,1270 1850,1270 105,1280 125,1280 145,1280 165,1280 290,1280 310,1280 1230,1280 1870,1285 1890,1285 1910,1285 1930,1285 1950,1285 1970,1285 1990,1285 740,1290 1830,1290 1850,1290 105,1300 125,1300 145,1300 165,1300 290,1300 310,1300 1990,1305 1830,1310 1850,1310 915,1315 1905,1315 105,1320 125,1320 145,1320 165,1320 290,1320 310,1320 1153.21,1320.17 1174.84,1320.33 890,1325 1990,1325 1830,1330 1850,1330 125,1340 145,1340 165,1340 290,1340 310,1340 1985,1345 1830,1350 1850,1350 925.5,1356 125,1360 145,1360 165,1360 290,1360 310,1360 330,1360 350,1360 1980,1365 125,1380 145,1380 165,1380 290,1380 310,1380 330,1380 350,1380 925,1380 1975,1385 370,1390 390,1390 410,1390 430,1390 450,1390 470,1390 490,1390 145,1400 165,1400 290,1400 310,1400 330,1400 350,1400 1105,1400 1965,1405 370,1410 390,1410 410,1410 430,1410 450,1410 470,1410 290,1420 310,1420 330,1420 350,1420 145,1425 165,1425 1955,1425 290,1440 310,1440 330,1440 350,1440 165,1445 1945,1445 290,1460 310,1460 330,1460 350,1460 1935,1465 290,1480 310,1480 330,1480 350,1480 1925,1485 290,1500 310,1500 330,1500 1920,1505 1910,1525 1905,1545 350,1575 1725,1585 1745,1585 1765,1585 1785,1585 1805,1585 1825,1585 1845,1585 350,1595 370,1595 1725,1605 1745,1605 1765,1605 1785,1605 1805,1605 1825,1605 1845,1605 350,1615 370,1615 390,1615 1725,1625 1745,1625 1765,1625 1785,1625 1805,1625 1825,1625 1845,1625 350,1635 370,1635 390,1635 410,1635 1725,1645 1745,1645 1765,1645 1785,1645 1805,1645 1825,1645 1845,1645 350,1655 370,1655 390,1655 410,1655 430,1655 1725,1665 1745,1665 1765,1665 1785,1665 1805,1665 1825,1665 350,1675 370,1675 390,1675 410,1675 430,1675 1725,1685 1745,1685 1765,1685 1785,1685 1805,1685 350,1695 370,1695 390,1695 410,1695 430,1695 450,1695 1725,1705 1745,1705 1765,1705 1785,1705 350,1715 370,1715 390,1715 410,1715 430,1715 450,1715 470,1715 490,1715 1745,1725 1765,1725 370,1735 370,1735 390,1735 410,1735 430,1735 450,1735 470,1735 490,1735 390,1755 410,1755 430,1755 450,1755 470,1755 490,1755 410,1775 430,1775 450,1775 470,1775 490,1775 430,1795 450,1795 470,1795 490,1795 840,1925 860,1925 880,1925 900,1925 920,1925 840,1945 860,1945 880,1945 900,1945 920,1945 1185,1955 1210,1955 1230,1955 1250,1955 1270,1955 1290,1955 1310,1955 1330,1955 840,1965 860,1965 880,1965 900,1965 920,1965 1185,1975 1210,1975 1230,1975 1250,1975 1270,1975 1290,1975 1310,1975 1330,1975 1350,1975 1370,1975 1390,1975 840,1985 860,1985 880,1985 900,1985 920,1985 1185,1995 1210,1995 1230,1995 1250,1995 1270,1995 1290,1995 1310,1995 1330,1995 1350,1995 840,2005 860,2005 880,2005 900,2005 920,2005 1170,2015 1190,2015 1210,2015 1230,2015 1250,2015 1270,2015 1290,2015 1170,2035 1190,2035 1210,2035
HG1: D1.2 R1.1 U1.12 | length 292.2
  Bottom Layer w8: U1.12@1099.21,1120.12 1112.96,1120.12 1113.27,1119.81 1117.42,1119.81 1117.67,1119.56 1126.18,1119.56 1145.2,1138.58 1145.2,1180.2 1160,1195 1205,1195 1225,1215 D1.2@1253.54,1215
  Bottom Layer w15: D1.2@1253.54,1215 1253.54,1238.54 1274.69,1259.69 R1.1@1274.69,1280
HG2: D3.2 R6.2 U1.19 | length 315.6
  Bottom Layer w8: U1.19@1099.21,1009.88 1135.12,1009.88 1145,1000 1145,955 1180,920 1197.6,920 1225.04,892.56 1225.04,879.96 1230,875 D3.2@1253.54,875
  Bottom Layer w15: D3.2@1253.54,875 1253.54,856.46 1269.68,840.32 R6.2@1269.68,810
ISN1: C2.1 R4.1 R5.1 U1.10 | length 200
  Bottom Layer w8: U1.10@1070.87,1164.21 1070.87,1184.13 1076.73,1190 1100,1190 1106.73,1196.73 R4.1@1106.73,1226.73 C2.1@1106.73,1281.73 1105,1283.46 R5.1@1105,1335
ISN2: C15.1 R8.2 U1.21 | length 186.7
  Bottom Layer w8: U1.21@1070.87,965.79 1070.87,939.13 1075,935 1100,935 1126.73,908.27 C15.1@1126.73,875 1126.73,856.73 1115,845 R8.2@1115,821.73
LED1: R23.1 U1.39 | length 147.3
  Bottom Layer w8: R23.1@821.73,1200 855,1200 860,1195 860,1135 874.88,1120.12 U1.39@900.79,1120.12
LED2: R22.1 U1.38 | length 111.5
  Bottom Layer w8: R22.1@821.73,1145 821.73,1118.27 835.63,1104.37 U1.38@900.79,1104.37
LED3: R21.1 U1.31 | length 394.8
  Top Layer w8: v1(845,1280) 844,1279 844,1201 905,1140 v1(905,965)
  Bottom Layer w8: R21.1@821.73,1280 v1(845,1280) ; U1.31@900.79,994.13 900.79,979.21 905,975 v1(905,965)
LG1: D2.2 R2.1 U1.15 | length 250.1
  Bottom Layer w8: U1.15@1099.21,1072.87 1272.56,1072.87 R2.1@1274.69,1075
  Bottom Layer w15: D2.2@1253.54,1140 1253.54,1121.46 1274.69,1100.31 R2.1@1274.69,1075
LG2: D4.2 R7.2 U1.16 | length 277.5
  Bottom Layer w8: U1.16@1099.21,1057.13 1212.87,1057.13 1230,1040 1230,1025 1245,1010 R7.2@1274.68,1010
  Bottom Layer w15: D4.2@1253.54,950 1253.54,973.54 1274.68,994.68 1274.68,1010 R7.2@1274.68,1015
NetD1_1: D1.1 Q4.4 R1.2 | length 391.4
  Signal Layer 1 w15: v1(1375,1280) 1490,1280 1525,1315 v1(1525,1400)
  Bottom Layer w10: v1(1525,1400) Q4.4@1557.6,1400
  Bottom Layer w15: D1.1@1346.46,1215 1346.46,1238.54 1335.32,1249.68 R1.2@1335.32,1280 v1(1375,1280)
NetD2_1: D2.1 Q2.4 R2.2 | length 708.6
  Signal Layer 1 w15: v1(1380,1140) 1515,1140 1757.6,1382.6 v1(1867.6,1382.6)
  Bottom Layer w10: v1(1867.6,1382.6) Q2.4@1867.6,1400
  Bottom Layer w15: R2.2@1335.32,1075 1335.32,1100.32 1346.46,1111.46 D2.1@1346.46,1140 v1(1380,1140)
NetD3_1: D3.1 Q3.4 R6.1 | length 552.9
  Signal Layer 1 w15: v1(1346.46,846.46) 1483.54,846.46 1560,770 v1(1560,555)
  Bottom Layer w15: R6.1@1330.31,810 1330.31,830.31 v1(1346.46,846.46) D3.1@1346.46,875 ; Q3.4@1557.6,575 1557.6,557.4 v1(1560,555)
NetD4_1: D4.1 Q1.4 R7.1 | length 922.2
  Signal Layer 1 w15: v1(1370,1010) 1520,1010 1765,765 1840,765 1865,740 v1(1865,555)
  Bottom Layer w15: R7.1@1335.31,1015 R7.1@1335.31,1010 ; D4.1@1346.46,945 D4.1@1346.46,950 1346.46,968.54 1335.31,979.69 R7.1@1335.31,1010 ; v1(1370,1010) R7.1@1335.31,1010 ; v1(1865,555) 1865,572.4 Q1.4@1867.6,575